# Altium PCB adapdterMagnometer.PcbDoc
Units mm, origin at the board's own origin, x right, y up, seen from the top; angles counter-clockwise.
Board outline 92.58 x 92.46 mm, 2 copper layers (Top Layer, Bottom Layer); 139 components, 119 nets, 578 pads, 0 vias.
Unrouted connection lines stored in the file: 284.
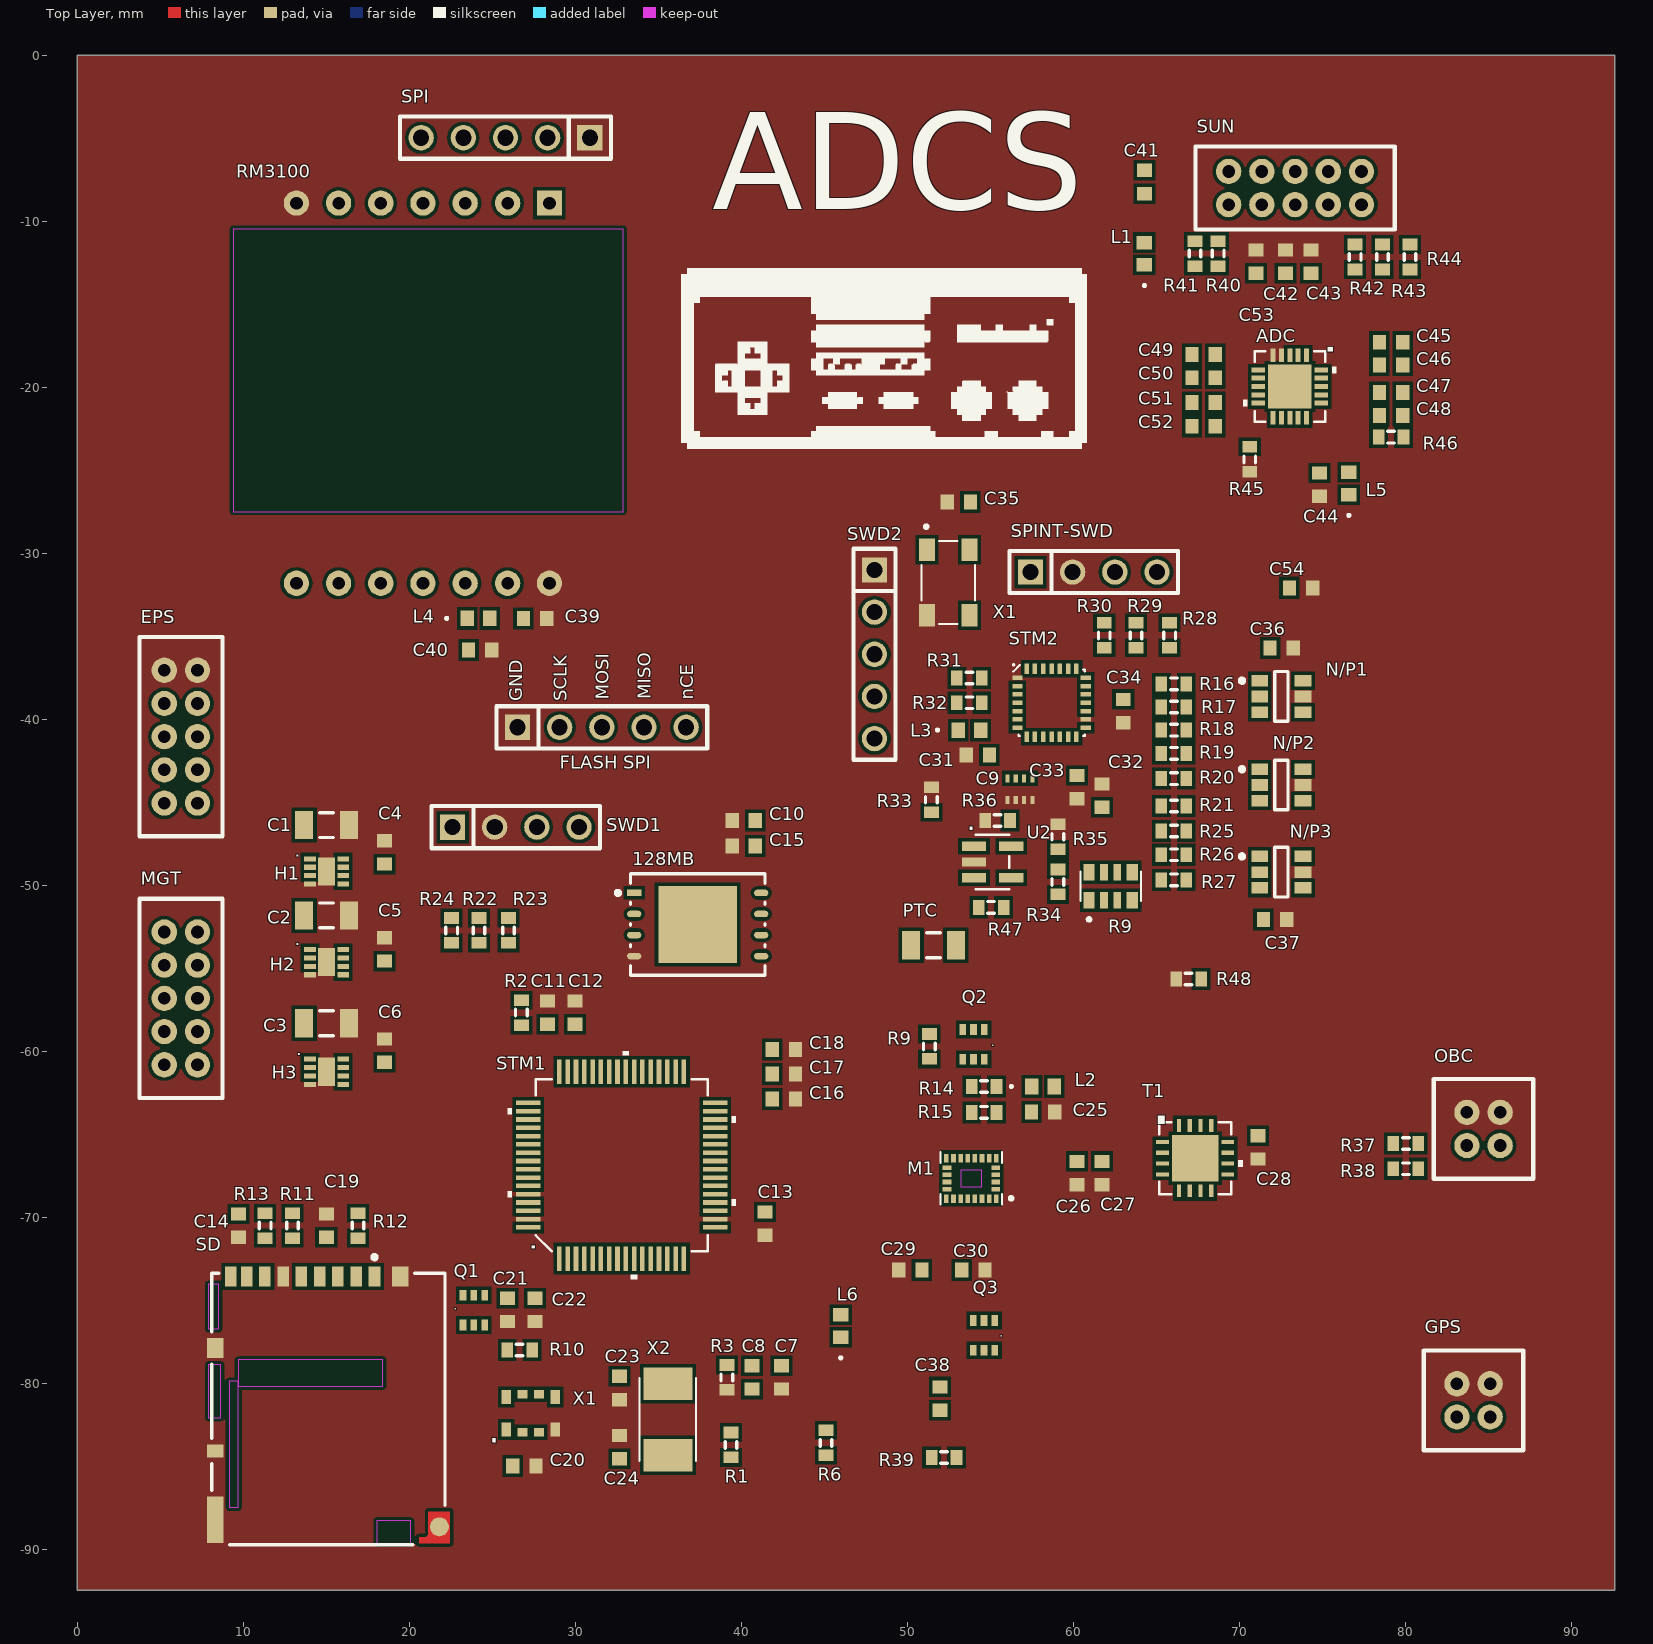
[diagram p0: Top Layer view]
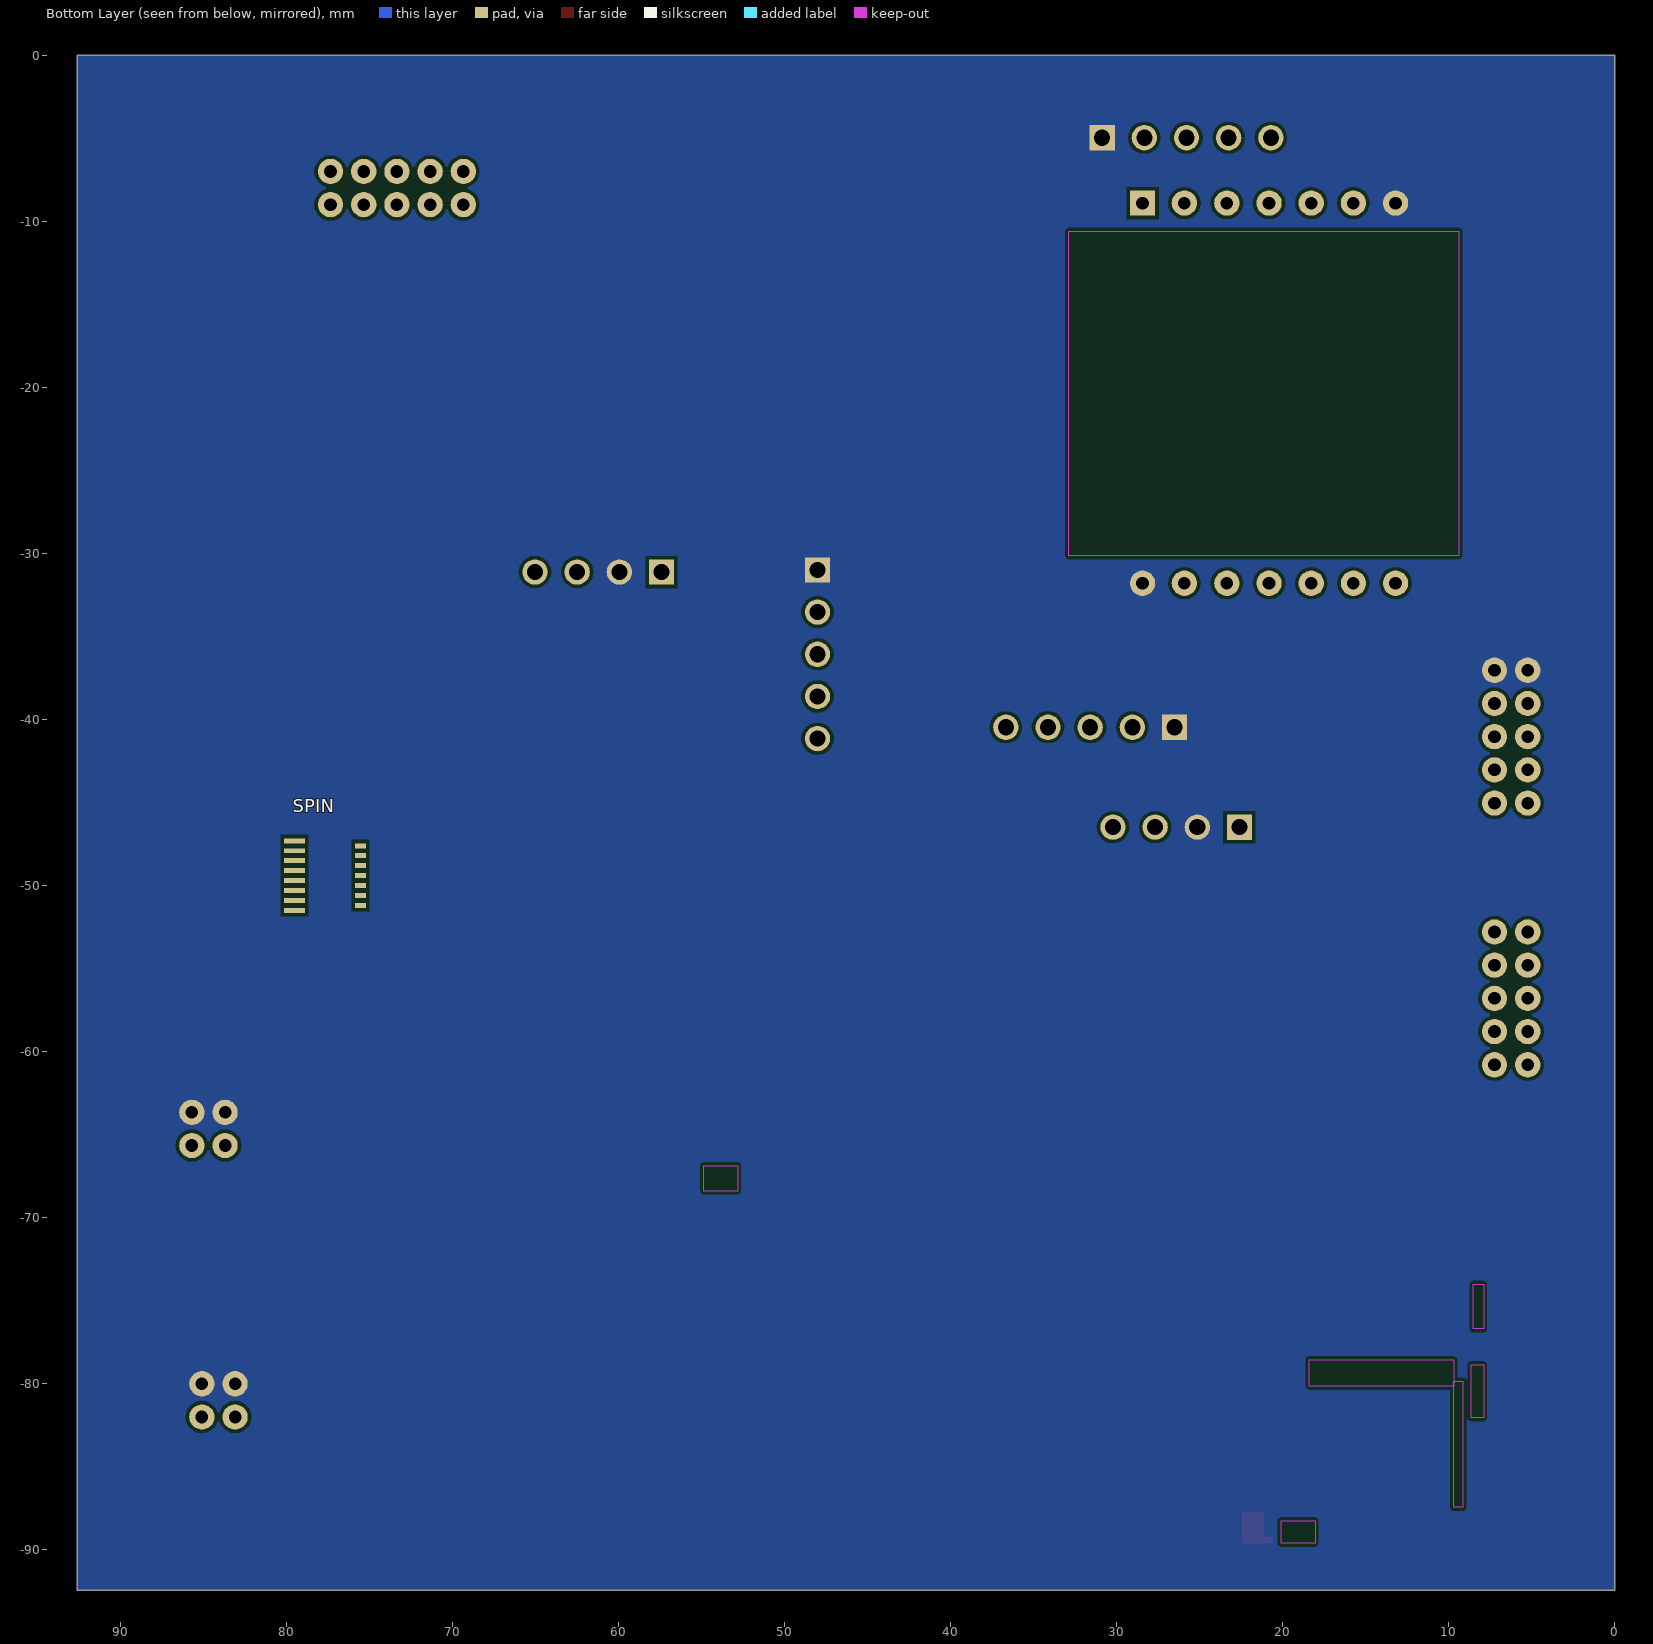
[diagram p1: Bottom Layer view, seen from below]

## Layer stack, top to bottom
Top Solder: solder mask 0.0102, Solder Resist, Dk 3.5
Top Layer: signal copper 0.0356
Dielectric 1: dielectric 0.32, FR-4, Dk 4.8
Bottom Layer: signal copper 0.0356
Bottom Solder: solder mask 0.0102, Solder Resist, Dk 3.5

## Board outline
0,-92.456 92.583,-92.456 92.583,0 0,0

## Design rules (kind name [scope] priority, off if disabled: settings)
Clearance [All] p1: gap=0.2 ignorepadtopadclearanceinfootprint=FALSE except(0.1: SMDPad-SMDPad)
PolygonConnect [All] p1: connectstyle=Direct reliefconductorwidth=0.254 reliefentries=4 polygonreliefangle="90 Angle" airgapwidth=0.254
RoutingVias [All] p1: holewidth=0.4 width=0.6 viastyle="Through Hole" minholewidth=0.4 minwidth=0.6 maxholewidth=0.4 maxwidth=0.6
SolderMaskExpansion [All] p1: expansion=0.05
UnRoutedNet [All] p1: checkbadconnections=TRUE
Width [All] p1: maxlimit=1 minlimit=0.1 preferedwidth=0.2 minimp=50.000000 maximp=50.000000 favimp=50.000000
29 further rules are at their usual default settings.

## Components (designator, comment, footprint, x,y, rotation, side; value= is the part's Value field where it differs from the comment)
128MB "Comment" ISSI_WSON-8_0 37.358,-52.347 r0 top
ADC "Comment" AD 73.025,-19.939 r270 top
C1 "C1" C1206 15,-46.355 r0 top
C2 "C2" C1206 15,-51.8 r0 top
C3 "C3" C1206 15,-58.3 r0 top
C4 "Comment" 1608[0603] 18.5,-48.006 r90 top
C5 "Comment" 1608[0603] 18.5,-53.848 r90 top
C6 "Comment" 1608[0603] 18.5,-59.944 r90 top
C7 "Comment" 1608[0603] 42.418,-79.629 r90 top
C8 "Comment" 1608[0603] 40.64,-79.629 r90 top
C9 "Comment" W2A4ZC104MAT2A 56.769,-44.196 r0 top
C10 "Comment" 1608[0603] 40.132,-46.08 r0 top
C11 "Comment" 1608[0603] 28.305,-57.658 r90 top
C12 "Comment" 1608[0603] 29.96,-57.658 r90 top
C13 "Comment" 1608[0603] 41.402,-70.363 r90 top
C14 "Comment" 1608[0603] 9.688,-70.485 r90 top
C15 "Comment" 1608[0603] 40.132,-47.625 r0 top
C16 "Comment" 1608[0603] 42.545,-62.865 r0 top
C17 "Comment" 1608[0603] 42.545,-61.341 r0 top
C18 "Comment" 1608[0603] 42.545,-59.874 r0 top
C19 "Comment" 1608[0603] 14.986,-70.485 r90 top
C20 "Comment" 1608[0603] 26.924,-84.963 r0 top
C21 "Comment" 1608[0603] 25.908,-75.565 r90 top
C22 "Comment" 1608[0603] 27.559,-75.565 r90 top
C23 "Comment" 1608[0603] 32.639,-80.264 r90 top
C24 "Comment" 1608[0603] 32.639,-83.82 r90 top
C25 "Comment" 1608[0603] 58.166,-63.627 r0 top
C26 "Comment" 1608[0603] 60.198,-67.315 r90 top
C27 "Comment" 1608[0603] 61.722,-67.315 r90 top
C28 "Comment" 1608[0603] 71.12,-65.773 r90 top
C29 "Comment" 1608[0603] 50.165,-73.152 r0 top
C30 "Comment" 1608[0603] 53.962,-73.152 r0 top
C31 "Comment" 1608[0603] 54.229,-42.143 r0 top
C32 "Comment" 1608[0603] 61.722,-44.577 r90 top
C33 "Comment" 1608[0603] 60.198,-44.069 r90 top
C34 "Comment" 1608[0603] 62.992,-39.489 r90 top
C35 "Comment" 1608[0603] 53.086,-26.903 r0 top
C36 "Comment" 1608[0603] 72.534,-35.687 r0 top
C37 "Comment" 1608[0603] 72.136,-52.049 r0 top
C38 "Comment" 1608[0603] 51.943,-80.899 r90 top
C39 "Comment" 1608[0603] 27.559,-33.909 r0 top
C40 "Comment" 1608[0603] 24.257,-35.814 r0 top
C41 "Comment" 1608[0603] 64.262,-7.62 r90 top
C42 "Comment" 1608[0603] 72.771,-12.411 r90 top
C43 "Comment" 1608[0603] 74.295,-12.411 r90 top
C44 "Comment" 1608[0603] 74.803,-25.848 r90 top
C45 "Comment" 1608[0603] 79.121,-17.272 r0 top
C46 "Comment" 1608[0603] 79.121,-18.648 r0 top
C47 "Comment" 1608[0603] 79.121,-20.299 r0 top
C48 "Comment" 1608[0603] 79.121,-21.684 r0 top
C49 "Comment" 1608[0603] 67.834,-18.001 r0 top
C50 "Comment" 1608[0603] 67.834,-19.41 r0 top
C51 "Comment" 1608[0603] 67.834,-20.914 r0 top
C52 "Comment" 1608[0603] 67.834,-22.331 r0 top
C53 "Comment" 1608[0603] 70.993,-12.411 r90 top
C54 "Comment" 1608[0603] 73.703,-32.063 r0 top
Designator1 "5pinSWD" 5pinSWD 1300.734,1233.043 r0 top
EPS "Comment" "2mm pitch con" 7.228,-37.031 r270 top
"FLASH SPI" "Comment" 5pinSWD 26.505,-40.466 r0 top
GPS "Comment" 2mm4way2row 83.09,-82.01 r90 top
H1 "Comment" ?DRV8837DSGR? 15,-49.149 r0 top
H2 "Comment" ?DRV8837DSGR? 15,-54.61 r0 top
H3 "Comment" ?DRV8837DSGR? 15,-61.214 r0 top
L1 "Comment" IND_BLM18_0603 64.262,-11.938 r90 top
L2 "Comment" IND_BLM18_0603 58.166,-62.103 r0 top
L3 "Comment" IND_BLM18_0603 53.721,-40.64 r0 top
L4 "Comment" IND_BLM18_0603 24.157,-33.909 r0 top
L5 "Comment" IND_BLM18_0603 76.581,-25.781 r90 top
L6 "Comment" IND_BLM18_0603 45.974,-76.533 r90 top
M1 "Comment" *PQFN43P300X350X102-24N 53.838,-67.641 r180 top
MGT "Comment" "2mm pitch con" 7.228,-52.795 r270 top
N/P1 "Comment" FDC6333C 72.517,-38.608 r0 top
N/P2 "Comment" FDC6333C 72.517,-43.942 r0 top
N/P3 "Comment" FDC6333C 72.517,-49.192 r0 top
OBC "Comment" 2mm4way2row 83.693,-65.659 r90 top
PTC "Comment" C1206 51.562,-53.594 r0 top
Q1 "Comment" Si1401EDH 23.228,-76.466 r0 top
Q2 "Comment" Si1401EDH 54.623,-58.674 r180 top
Q3 "Comment" Si1401EDH 55.258,-76.2 r180 top
R1 "Comment" J1-0603 39.37,-83.693 r90 top
R2 "Comment" J1-0603 26.734,-57.658 r90 top
R3 "Comment" J1-0603 39.116,-79.629 r90 top
R6 "Comment" J1-0603 45.085,-83.566 r90 top
R9 "Comment" J1-0603 51.308,-59.69 r90 top
R9 "Comment" EXB 62.23,-50.038 r90 top
R10 "Comment" J1-0603 26.632,-77.978 r0 top
R11 "Comment" J1-0603 12.954,-70.485 r90 top
R12 "Comment" J1-0603 16.891,-70.485 r90 top
R13 "Comment" J1-0603 11.303,-70.485 r90 top
R14 "Comment" J1-0603 54.61,-62.103 r0 top
R15 "Comment" J1-0603 54.61,-63.659 r0 top
R16 "Comment" J1-0603 66.04,-37.846 r0 top
R17 "Comment" J1-0603 66.04,-39.243 r0 top
R18 "Comment" J1-0603 66.04,-40.64 r0 top
R19 "Comment" J1-0603 66.04,-42.037 r0 top
R20 "Comment" J1-0603 66.04,-43.561 r0 top
R21 "Comment" J1-0603 66.04,-45.212 r0 top
R22 "Comment" J1-0603 24.186,-52.705 r90 top
R23 "Comment" J1-0603 25.964,-52.705 r90 top
R24 "Comment" J1-0603 22.535,-52.705 r90 top
R25 "Comment" J1-0603 66.04,-46.711 r0 top
R26 "Comment" J1-0603 66.04,-48.142 r0 top
R27 "Comment" J1-0603 66.04,-49.657 r0 top
R28 "Comment" J1-0603 65.786,-34.925 r90 top
R29 "Comment" J1-0603 63.754,-34.925 r90 top
R30 "Comment" J1-0603 61.849,-34.925 r90 top
R31 "Comment" J1-0603 53.721,-37.496 r0 top
R32 "Comment" J1-0603 53.721,-38.989 r0 top
R33 "Comment" J1-0603 51.435,-44.831 r90 top
R34 "Comment" J1-0603 59.055,-49.784 r90 top
R35 "Comment" J1-0603 59.055,-47.061 r90 top
R36 "Comment" J1-0603 55.423,-46.08 r0 top
R37 "Comment" J1-0603 80.01,-65.532 r0 top
R38 "Comment" J1-0603 80.01,-67.056 r0 top
R39 "Comment" J1-0603 52.197,-84.455 r0 top
R40 "Comment" J1-0603 68.707,-11.938 r90 top
R41 "Comment" J1-0603 67.31,-11.938 r90 top
R42 "Comment" J1-0603 76.962,-12.138 r90 top
R43 "Comment" J1-0603 78.613,-12.138 r90 top
R44 "Comment" J1-0603 80.264,-12.138 r90 top
R45 "Comment" J1-0603 70.612,-24.324 r90 top
R46 "Comment" J1-0603 79.121,-22.987 r0 top
R47 "Comment" J1-0603 55.034,-51.308 r0 top
R48 "Comment" J1-0603 66.929,-55.626 r0 top
RM3100 "Comment" RM3100 28.428,-31.79 r180 top
SD "Comment" Hirose_Electric_DM3AT-SF-PEJM5_0 15.113,-81.534 r0 top
SPI "Comment" 5pinSWD 30.861,-4.953 r180 top
SPIN "Comment" FH23-15S-0.3SHAW 77.437,-49.403 r270 bottom
SPINT-SWD "Comment" 4pinSWD 57.404,-31.115 r0 top
STM1 "Comment" LQFP-64 32.778,-66.84 r90 top
STM2 "Comment" *QFN50P400X400X60-28N 58.674,-38.989 r0 top
SUN "Comment" "2mm pitch con" 69.342,-6.985 r0 top
SWD1 "Comment" 4pinSWD 22.591,-46.482 r0 top
SWD2 "Comment" 5pinSWD 48.006,-30.988 r270 top
T1 "Comment" ADT 67.32,-66.421 r0 top
U2 "Comment" INA139 55.118,-48.578 r0 top
X1 "Comment" ?KT3225T3 27.305,-81.788 r0 top
X1 "Comment" *OSC_ECS-TXO-5032-120-TR 52.451,-31.75 r270 top
X2 "Comment" ABM3XTAL 35.56,-82.169 r90 top

## Footprints (in the part's own frame and the unit in brackets; to place one, negate y for a bottom-side part, rotate by r counter-clockwise, add the part's x,y. Pads: shape width x height; smd on the part's side, far side on the other; paste and mask are expansions set on the pad)
2mm4way2row [mil]
  round 60 hole 30: 1(0,0) 2(78.74,0) 3(0,-78.74) 4(78.74,-78.74)
  silkscreen extent -79,-157 157,79, body extent -92,-163 170,85, height 252
"2mm pitch con" [mil]
  round 60 hole 30: 1(0,0) 2(0,-78.74) 3(78.74,0) 4(78.74,-78.74) 5(157.48,0) 6(157.48,-78.74) 7(236.22,0) 8(236.22,-78.74) 9(314.96,0) 10(314.96,-78.74)
  silkscreen extent -79,-138 394,59, body extent -79,-138 394,59, height 260
4pinSWD [mil]
  rect 60x60 hole 38.19: 1(0,0)
  round 60 hole 38.19: 2(100,0) 3(200,0) 4(300,0)
  silkscreen extent -50,-50 350,50
5pinSWD [mil]
  rect 60x60 hole 38.19: 1(0,0)
  round 60 hole 38.19: 2(100,0) 3(200,0) 4(300,0) 5(400,0)
  silkscreen extent -50,-50 450,50
1608[0603] [mm] "Chip Capacitor, Body 1.6x0.8mm, IPC High Density"
  rect 0.8x0.9 smd: 1(-0.7,0) 2(0.7,0)
  body extent -0.87,-0.48 0.87,0.48, height 1.3
*OSC_ECS-TXO-5032-120-TR [mm]
  rect 1.35x0.95 smd: 1(-1.975,-1.275) 2(1.975,-1.275) 3(1.975,1.275) 4(-1.975,1.275)
  silkscreen extent -3.47,-1.6 2.5,1.6
*PQFN43P300X350X102-24N [mm]
  rect 0.28x0.53 smd: 1(-1.505,1.22) 6(-1.505,-1.22) 7(-1.075,-1.22) 8(-0.645,-1.22) 9(-0.215,-1.22) 10(0.215,-1.22) 11(0.645,-1.22) 12(1.075,-1.22) 13(1.505,-1.22) 18(1.505,1.22) 19(1.075,1.22) 20(0.645,1.22) 21(0.215,1.22) 22(-0.215,1.22) 23(-0.645,1.22) 24(-1.075,1.22)
  rect 0.53x0.28 smd: 2(-1.47,0.645) 3(-1.47,0.215) 4(-1.47,-0.215) 5(-1.47,-0.645) 14(1.47,-0.645) 15(1.47,-0.215) 16(1.47,0.215) 17(1.47,0.645)
  Top Layer keep-out region: -0.645,-0.508 0.645,-0.508 0.645,0.508 -0.645,0.508
  Bottom Layer keep-out region: -1.016,-0.762 1.016,-0.762 1.016,0.762 -1.016,0.762
  silkscreen extent -2.5,-1.58 1.86,1.58
*QFN50P400X400X60-28N [mm]
  rect 0.62x0.27 smd: 1(-2.055,1.5) 2(-2.055,1) 3(-2.055,0.5) 4(-2.055,0) 5(-2.055,-0.5) 6(-2.055,-1) 7(-2.055,-1.5) 15(2.055,-1.5) 16(2.055,-1) 17(2.055,-0.5) 18(2.055,0) 19(2.055,0.5) 20(2.055,1) 21(2.055,1.5)
  rect 0.27x0.62 smd: 8(-1.5,-2.055) 9(-1,-2.055) 10(-0.5,-2.055) 11(0,-2.055) 12(0.5,-2.055) 13(1,-2.055) 14(1.5,-2.055) 22(1.5,2.055) 23(1,2.055) 24(0.5,2.055) 25(0,2.055) 26(-0.5,2.055) 27(-1,2.055) 28(-1.5,2.055)
  silkscreen extent -2.34,-2 2,2.34
?DRV8837DSGR? [mil]
  rect 28x12 smd: 1(-39.5,30) 2(-39.5,10) 3(-39.5,-10) 4(-39.5,-30) 5(39.5,-30) 6(39.5,-10) 7(39.5,10) 8(39.5,30)
  rect 40x67 smd paste-33 mask+0: 9(0,0)
  body extent 0,0 10,10, height 10
?KT3225T3 [mm]
  rect 0.55x0.85 smd: 1(-1.475,0.975) 4(1.475,0.975) 5(-1.475,-0.975) 8(1.475,-0.975)
  rect 0.6x0.5 smd: 2(-0.5,1.15) 3(0.5,1.15) 6(-0.5,-1.15) 7(0.5,-1.15)
ABM3XTAL [mm]
  rect 1.95x2.95 smd: 1(-2.15,0) 2(2.15,0)
  silkscreen extent -2.5,-1.7 2.5,1.7
AD [mil]
  rect 32x12 smd: 1(-74.5,39.37) 2(-74.5,19.69) 3(-74.5,0) 4(-74.5,-19.68) 5(-74.5,-39.37) 11(74.5,-39.37) 12(74.5,-19.68) 13(74.5,0) 14(74.5,19.69) 15(74.5,39.37)
  rect 12x32 smd: 6(-39.37,-74.5) 7(-19.69,-74.5) 8(0,-74.5) 9(19.68,-74.5) 10(39.37,-74.5) 16(39.37,74.5) 17(19.68,74.5) 18(0,74.5) 19(-19.69,74.5) 20(-39.37,74.5)
  rect 104x104 smd paste-51.5 mask+0: 21(0,0)
  silkscreen extent -84,-110 84,110, body extent 0,0 10,10, height 10
ADT [mil]
  rect 30x10 smd paste+0 mask+3.94: 1(-77.5,38.39) 2(-77.5,12.8) 3(-77.5,-12.8) 4(-77.5,-38.39) 9(77.5,-38.39) 10(77.5,-12.8) 11(77.5,12.8) 12(77.5,38.39)
  rect 10x30 smd paste+0 mask+3.94: 5(-38.39,-77.5) 6(-12.8,-77.5) 7(12.8,-77.5) 8(38.39,-77.5) 13(38.39,77.5) 14(12.8,77.5) 15(-12.8,77.5) 16(-38.39,77.5)
  rect 110x110 smd paste-54.5 mask+0: 17(0,0)
  silkscreen extent -85,-86 112,86, body extent 0,0 10,10, height 10
C1206 [mm] "Chip Capacitor, Body 3.2x1.6mm, IPC High Density"
  rect 1.1x1.7 smd: 1(-1.35,0) 2(1.35,0)
  silkscreen extent -0.4,-0.75 0.4,0.75, body extent -1.7,-0.9 1.7,0.9, height 1.3
EXB [mm]
  rect 0.98x0.68 smd: 1(-0.845,1.3) 4(-0.845,-1.3) 5(0.845,-1.3) 8(0.845,1.3)
  rect 0.98x0.48 smd: 2(-0.845,0.4) 3(-0.845,-0.4) 6(0.845,-0.4) 7(0.845,0.4)
  silkscreen extent -2.1,-1.82 0.88,1.82
FDC6333C [mm]
  rect 1x0.7 smd paste+0 mask+0: 1(-1.3,0.95) 2(-1.3,0) 3(-1.3,-0.95) 4(1.3,-0.95) 5(1.3,0) 6(1.3,0.95)
  silkscreen extent -2.5,-1.5 0.4,1.5, body extent -1.9,-1.85 1.9,1.85, height 0.25
FH23-15S-0.3SHAW [mm]
  rect 0.3x0.65 smd: 1(-1.8,1.9) 2(-1.2,1.9) 3(-0.6,1.9) 4(0,1.9) 5(0.6,1.9) 6(1.2,1.9) 7(1.8,1.9)
  rect 0.3x1.25 smd: 8(-2.1,-2.075) 9(-1.5,-2.075) 10(-0.9,-2.075) 11(-0.3,-2.075) 12(0.3,-2.075) 13(0.9,-2.075) 14(1.5,-2.075) 15(2.1,-2.075)
  body extent -3.5,-2.64 3.5,2.16, height 1.24
Hirose_Electric_DM3AT-SF-PEJM5_0 [mm]
  rect 0.7x1.2 smd paste+0 mask+0: 1(2.775,7.975) 2(1.675,7.975) 3(0.575,7.975) 4(-0.525,7.975) 5(-1.625,7.975) 6(-2.725,7.975) 7(-3.825,7.975) 8(-4.925,7.975) 9(-5.875,7.975)
  rect 1x0.8 smd paste+0 mask+0: 10(-6.825,-2.525)
  rect 1x1.2 smd paste+0 mask+0: 11(4.325,7.975) 12(-6.825,3.675)
  rect 1x2.8 smd paste+0 mask+0: 13(-6.825,-6.675)
  round 1.145 smd paste+0 mask+0: 14(6.689,-7.092)
  Top Layer region: 6.025,-6.175 7.325,-6.175 7.325,-8.075 5.475,-8.075 5.475,-7.725 5.875,-7.725 6.025,-7.575 6.025,-6.175
  Keep-Out Layer region: 2.925,-8.075 4.953,-8.075 4.953,-6.725 2.925,-6.725
  Keep-Out Layer region: -5.425,1.375 3.275,1.375 3.275,2.975 -5.425,2.975
  Keep-Out Layer region: -5.969,-5.925 -5.425,-5.925 -5.425,1.675 -5.969,1.675
  Keep-Out Layer region: -7.225,-0.525 -6.475,-0.525 -6.475,2.667 -7.225,2.667
  Keep-Out Layer region: -7.225,4.826 -6.604,4.826 -6.604,7.525 -7.225,7.525
  silkscreen extent -7.02,-8.17 7.02,9.27, body extent -7.42,-8.27 7.43,8.67, height 0.25
INA139 [mil]
  rect 58x22 smd: 1(-44,37.4) 2(-44,0) 3(-44,-37.4) 4(44,-37.4) 5(44,37.4)
  silkscreen extent -40,-65 40,65, body extent 0,0 10,10, height 10
IND_BLM18_0603 [mil]
  rect 32x37 smd: 1(-26.5,0) 2(26.5,0)
  silkscreen extent -78,-3 -73,3, body extent 0,0 10,10, height 10
ISSI_WSON-8_0 [mm]
  rect 0.861x0.392 smd paste+0 mask+0: 1(-3.826,1.905)
  oval 0.861x0.392 smd paste+0 mask+0: 2(-3.826,0.635) 3(-3.826,-0.635) 4(-3.826,-1.905) 5(3.826,-1.905) 6(3.826,-0.635) 7(3.826,0.635) 8(3.826,1.905)
  rect 4.75x4.65 smd paste-1000 mask+0: 9(0,0)
  silkscreen extent -4.93,-3.05 4.05,3.05, body extent -4.36,-3.15 4.36,3.15, height 0.25
J1-0603 [mm] "Chip Resistor, Body 1.6x0.8mm, IPC High Density"
  rect 0.7x0.9 smd: 1(-0.75,0) 2(0.75,0)
  silkscreen extent -0.2,-0.35 0.2,0.35, body extent -0.85,-0.48 0.85,0.48, height 0.9
LQFP-64 [mil]
  rect 58x11 smd: 1(-221.5,147.64) 2(-221.5,127.95) 3(-221.5,108.27) 4(-221.5,88.58) 5(-221.5,68.9) 6(-221.5,49.21) 7(-221.5,29.53) 8(-221.5,9.84) 9(-221.5,-9.84) 10(-221.5,-29.53) 11(-221.5,-49.21) 12(-221.5,-68.9) 13(-221.5,-88.58) 14(-221.5,-108.27) 15(-221.5,-127.95) 16(-221.5,-147.64) 33(221.5,-147.64) 34(221.5,-127.95) 35(221.5,-108.27) 36(221.5,-88.58) 37(221.5,-68.9) 38(221.5,-49.21) 39(221.5,-29.53) 40(221.5,-9.84) 41(221.5,9.84) 42(221.5,29.53) 43(221.5,49.21) 44(221.5,68.9) 45(221.5,88.58) 46(221.5,108.27) 47(221.5,127.95) 48(221.5,147.64)
  rect 11x58 smd: 17(-147.64,-221.5) 18(-127.95,-221.5) 19(-108.27,-221.5) 20(-88.58,-221.5) 21(-68.9,-221.5) 22(-49.21,-221.5) 23(-29.53,-221.5) 24(-9.84,-221.5) 25(9.84,-221.5) 26(29.53,-221.5) 27(49.21,-221.5) 28(68.9,-221.5) 29(88.58,-221.5) 30(108.27,-221.5) 31(127.95,-221.5) 32(147.64,-221.5) 49(147.64,221.5) 50(127.95,221.5) 51(108.27,221.5) 52(88.58,221.5) 53(68.9,221.5) 54(49.21,221.5) 55(29.53,221.5) 56(9.84,221.5) 57(-9.84,221.5) 58(-29.53,221.5) 59(-49.21,221.5) 60(-68.9,221.5) 61(-88.58,221.5) 62(-108.27,221.5) 63(-127.95,221.5) 64(-147.64,221.5)
  silkscreen extent -270,-270 270,270, body extent 0,0 10,10, height 10
RM3100 [mil]
  round 60 hole 30: 1(0,0) 2(99.21,0) 2(99.21,-901.57) 3(200,0) 3(200,-901.57) 4(300,0) 4(300,-901.57) 5(400,0) 5(400,-901.57) 6(500,0) 6(500,-901.57) 7(600,0) 7(600,-901.57)
  rect 60x60 hole 30: 1(0,-901.57)
  Top Layer keep-out region: -175,-840 750,-840 750,-170 -175,-170
  Bottom Layer keep-out region: -175,-835 750,-835 750,-65 -175,-65
Si1401EDH [mm]
  rect 0.406x0.648 smd mask+0.05: 1(0,0) 2(0.648,0) 3(1.296,0) 4(0,1.79) 5(0.648,1.79) 6(1.296,1.79)
W2A4ZC104MAT2A [mm]
  rect 0.25x0.5 smd: 8(-0.75,-0.65) 8(-0.75,0.65) 8(-0.25,-0.65) 8(-0.25,0.65) 8(0.25,-0.65) 8(0.25,0.65) 8(0.75,-0.65) 8(0.75,0.65)

## Part data
128MB: "IS25LP016D"
C1 C2 C3: "10u"
C4 C5 C6 C28 C41 C42 C43 C44 C53: "100n"
C29: "100nF"
C30: "1nF"
PTC: "PTC"
R48: "10k"

## Nets (pads, with @x,y where several pads share a name; then routed paths per layer and width w, separated by ;. In a path a pad name is that pad's centre, name@x,y a point inside that pad or via, vN(x,y) a via of type N, cw(c..) or ccw(c..) an arc to the next point about the centre after c; other vN are vias at no path point)
3.3V: 128MB.8 C4.1 C5.1 C6.1 C10.2 C11.1 C15.2 C17.1 C18.1 C20.1 C21.2 C22.2 C34.2 C35.2 C38.1 C54.1 EPS.3 EPS.4 H1.7 H1.8 H2.7 H2.8 H3.7 H3.8 L3.1 L6.2 Q1.6 Q2.6 Q3.6 R2.2 R9.1@51.308,-60.44 R10.2 R32.1 R36.2 STM1.1 STM1.32 STM1.48 STM1.64 STM2.17 SWD2.4 U2.5 X1.1@25.83,-80.813 X1.4@53.726,-29.775 X1.5
3.3V_SEN: C25.1 C28.2 C40.1 L2.1 L4.1 M1.1 M1.3 M1.5 M1.6 M1.7 M1.8 Q2.1 Q2.2 Q2.4 Q2.5 R14.2 R15.2 RM3100.3@23.348,-31.79 T1.12
3.3Vref: ADC.17 C47.1 R44.1
3.3VrefR: C7.2 C8.1 L6.1 R44.2 STM1.13 SUN.10
5V: ADC.15 C1.1 C2.1 C3.1 C44.2 EPS.5 EPS.6 H1.1 H2.1 H3.1 L1.1 L5.1 PTC.1
5V_ST: PTC.2 R47.1 SWD2.5 U2.3
5V_STEN: C36.1 C37.1 N/P1.2 N/P2.2 N/P3.2 R17.2 R20.2 R26.2 R34.1 R47.2 U2.4
AD: R16.1 STM2.15
AD_R: N/P1.1 R16.2
ADC_REF: ADC.2 C42.1
ADC_REFIN: ADC.3 C53.1
ADC_VDD: ADC.1 ADC.20 C43.1 L5.2
Am: C9.8@56.519,-43.546 R9.5 STM2.7
Ap: C9.8@56.019,-43.546 R9.8 STM2.6
AU: R18.1 STM2.20
AU_R: N/P1.3 R17.1 R18.2
AVDD: C39.1 L4.2 RM3100.2@25.908,-31.79
BD: R19.1 STM2.14
BD_R: N/P2.1 R19.2
Bm: 
Bp: C9.8@57.019,-43.546 R9.7 STM2.8
BU: R21.1 STM2.19
BU_R: N/P2.3 R20.1 R21.2
C1_SENS: C29.2 M1.24
C7: 
C12: C12.1 STM1.47
C13: C13.2 STM1.19
C16: C16.1 STM1.31
C17: 
C23: C23.2 STM1.5 X2.2
C24: C24.1 R1.1 X2.1
CAP_SENS_21: C30.1 M1.21
CD: R25.1 STM2.13
CD_R: N/P3.1 N/P3.3 R25.2 R27.2
CLKOUT: STM1.3 X1.4@28.78,-80.813
Cm: C33.2 R33.1 STM2.11 U2.1
CNV: ADC.11 SPI.5 STM1.40
Cp: C9.8@57.519,-43.546 R9.6 STM2.9
CU: R27.1 STM2.18
CU_R: R26.1
FM_nCE: 128MB.1 "FLASH SPI.5" STM1.44
FM_nHLD: 128MB.7 STM1.33
FM_nWP: 128MB.3 STM1.45
GND: 128MB.4 "FLASH SPI.1" ADC.4 ADC.5 C1.2 C2.2 C3.2 C4.2 C5.2 C6.2 C7.1 C9.8@56.019,-44.846 C9.8@56.519,-44.846 C9.8@57.019,-44.846 C9.8@57.519,-44.846 C10.1 C11.2 C12.2 C13.1 C14.1 C15.1 C16.2 C17.2 C18.2 C19.2 C20.2 C21.1 C22.1 C23.1 C24.2 C25.2 C26.1 C27.1 C28.1 C29.1 C30.2 C31.1 C32.2 C33.1 C34.1 C35.1 C36.2 C37.2 C39.2 C40.2 C42.2 C43.2 C44.1 C53.2 C54.2 EPS.1 EPS.2 GPS.2 GPS.4 H1.4 H1.9 H2.4 H2.9 H3.4 H3.9 N/P1.5 N/P2.5 N/P3.5 OBC.2 OBC.4 R3.1 R33.2 R35.2 R36.1 R45.1 R48.1 RM3100.1@28.428,-31.79 RM3100.7@13.188,-8.89 SD.6 SD.10 SD.11 SD.12 SD.13 SPI.1 SPINT-SWD.2 STM1.18 STM1.60 STM1.63 STM2.1 STM2.16 SWD1.2 SWD2.1 U2.2 X1.2@51.176,-33.725 X1.8
GND_SEN: M1.13 M1.14 M1.15 M1.16 M1.17 M1.18 M1.19 M1.20 T1.3 T1.4 T1.11 T1.17
GPS_EN: C38.2 Q3.3 STM1.20
GPS_ENPIN: GPS.1 Q3.1 Q3.2 Q3.4 Q3.5
GPS_RX: GPS.3 R39.2
IN6: ADC.8 C51.2
IN7: ADC.9 C52.2
L_ST: R31.1 X1.3@53.726,-33.725
MISO: ADC.14 RM3100.2@25.908,-8.89 SPI.3 STM1.22
MISO2: 128MB.2 "FLASH SPI.4" STM1.35
MOSI: ADC.12 RM3100.3@23.348,-8.89 SPI.4 STM1.23
MOSI2: 128MB.5 "FLASH SPI.3" STM1.36
MTx1: H1.6 STM1.61
MTx2: H1.5 STM1.62
MTy1: H2.6 STM1.58
MTy2: H2.5 STM1.59
MTz1: H3.6 STM1.56
MTz2: H3.5 STM1.57
nRST: R2.1 R22.1 STM1.7
nRST_R: R22.2 SWD1.4
NRST_S: R28.1 R32.2 STM2.4
OBC_RX: OBC.3 R38.2
OBC_TX: OBC.1 R37.2
OUTX_1: H1.2 MGT.1
OUTX_2: H1.3 MGT.2
OUTY_1: H2.2 MGT.5
OUTY_2: H2.3 MGT.6
OUTZ_1: H3.2 MGT.9
OUTZ_2: H3.3 MGT.10
PF0: R31.2 STM2.2
PhA: N/P1.4 N/P1.6
PhB: N/P2.4 N/P2.6
PhC: N/P3.4 N/P3.6
R1: R1.2 STM1.6
R37: R37.1 STM1.16
R38: R38.1 STM1.17
R39: R39.1 STM1.15
RM_CS: STM1.41
RST_ST: R28.2 SPINT-SWD.4
SCL: M1.2 R15.1 STM1.29 STM2.27 SWD2.2 T1.1
SCLK: ADC.13 RM3100.1@28.428,-8.89 SPI.2 STM1.21
SCLK2: 128MB.6 "FLASH SPI.2" STM1.34
SD_CLK: R11.1 SD.5 STM1.53
SD_CMD: R13.1 SD.7 STM1.54
SD_DO: R12.1 SD.3 STM1.39
SD_EN: Q1.3 R10.1 STM1.2
SD_VCC: C14.2 C19.1 Q1.1 Q1.2 Q1.4 Q1.5 R11.2 R12.2 R13.2 SD.4
SDA: M1.4 R14.1 STM1.30 STM2.28 SWD2.3 T1.2
SENS_EN: Q2.3 R9.2@51.308,-58.94 STM1.28
SENS_VDD: C26.2 C27.2 L2.2 M1.22 M1.23
SETC: 
SETP: 
SP: R48.2
SS1: ADC.7 C50.2 R41.1
SS1_R: R41.2 SUN.2
SS2: ADC.6 C49.2 R40.1
SS2_R: R40.2 SUN.4
SS3: ADC.19 C45.1 R42.1
SS3_R: R42.2 SUN.6
SS4: ADC.18 C46.1 R43.1
SS4_R: R43.2 SUN.8
SU_TH_GO: ADC.16 C48.1 R46.1
SU_TH_RET: 
SUN_GND: ADC.10 C41.2 C45.2 C46.2 C47.2 C48.2 C49.1 C50.1 C51.1 C52.1 R45.2 R46.2 SUN.3 SUN.5 SUN.7 SUN.9
SUN_P2: C41.1 L1.2 SUN.1
SWCLK: R24.1 STM1.49
SWCLK_R: R24.2 SWD1.1
SWCLK_RS: R30.2 SPINT-SWD.1
SWCLK_S: R30.1 STM2.22
SWDIO: R23.1 STM1.46
SWDIO_R: R23.2 SWD1.3
SWDIO_RS: R29.2 SPINT-SWD.3
SWDIO_S: R29.1 STM2.21
VDDA: L3.2 STM2.5
Vm: C32.1 R34.2 R35.1 STM2.12
VSS_GND: C8.2 R3.2 STM1.12
pads on no net: 128MB.9 ADC.21 C31.2 Designator1.1 Designator1.2 Designator1.3 Designator1.4 Designator1.5 EPS.7 EPS.8 EPS.9 EPS.10 M1.9 M1.10 M1.11 M1.12 MGT.3 MGT.4 MGT.7 MGT.8 R6.1 R6.2 R9.1@60.93,-50.883 R9.2@61.83,-50.883 R9.3 R9.4 RM3100.4 RM3100.5 RM3100.6 RM3100.7@13.188,-31.79 SD.1 SD.2 SD.8 SD.9 SD.14 SPIN.1 SPIN.2 SPIN.3 SPIN.4 SPIN.5 SPIN.6 SPIN.7 SPIN.8 SPIN.9 SPIN.10 SPIN.11 SPIN.12 SPIN.13 SPIN.14 SPIN.15 STM1.4 STM1.8 STM1.9 STM1.10 STM1.11 STM1.14 STM1.24 STM1.25 STM1.26 STM1.27 STM1.37 STM1.38 STM1.42 STM1.43 STM1.50 STM1.51 STM1.52 STM1.55 STM2.3 STM2.10 STM2.23 STM2.24 STM2.25 STM2.26 T1.5 T1.6 T1.7 T1.8 T1.9 T1.10 T1.13 T1.14 T1.15 T1.16 X1.1@51.176,-29.775 X1.2@26.805,-80.638 X1.3@27.805,-80.638 X1.6 X1.7

## Polygon pours and split planes (outlines as drawn)
GND on Top Layer "GND_L01_P001" (solid, pour order 1): 0,-92.456 92.583,-92.456 92.583,0 0,0
GND on Bottom Layer "GND_L02_P002" (solid, pour order 2): 0,-92.456 92.583,-92.456 92.583,0 0,0

## Silkscreen, mask and mechanical layers (free items; w line width, h text height)
Top Overlay:
  drawing of 902 lines, arcs and shapes, not listed
  text "ADCS" at 38.227,-11.176 h10
  text "MISO" at 34.544,-38.773 h0.8 r90
  text "MOSI" at 32.004,-38.822 h0.8 r90
  text "nCE" at 37.084,-38.822 h0.8 r90
  text "GND" at 26.797,-38.9 h0.8 r90
  text "SCLK" at 29.464,-38.893 h0.8 r90
  text "." at 24.765,-83.566 h1.52

## Text inside footprints (layer, text, board x,y; h text height)
ADC: Mechanical 13 "*" at 73.64,-18.136 h1.27 r270
STM1: Mechanical 13 "*" at 29.413,-71.831 h1.27 r90
T1: Mechanical 13 "*" at 65.415,-65.756 h1.27
U2: Mechanical 13 "*" at 54.178,-48.161 h1.27